# Altium PCB PCB_PROJECT_01.PcbDoc
Units mm, origin at the board's own origin, x right, y up, seen from the top; angles counter-clockwise.
Board outline 50 x 70 mm, 2 copper layers (Top Layer, Bottom Layer); 30 components, 29 nets, 133 pads, 18 vias.
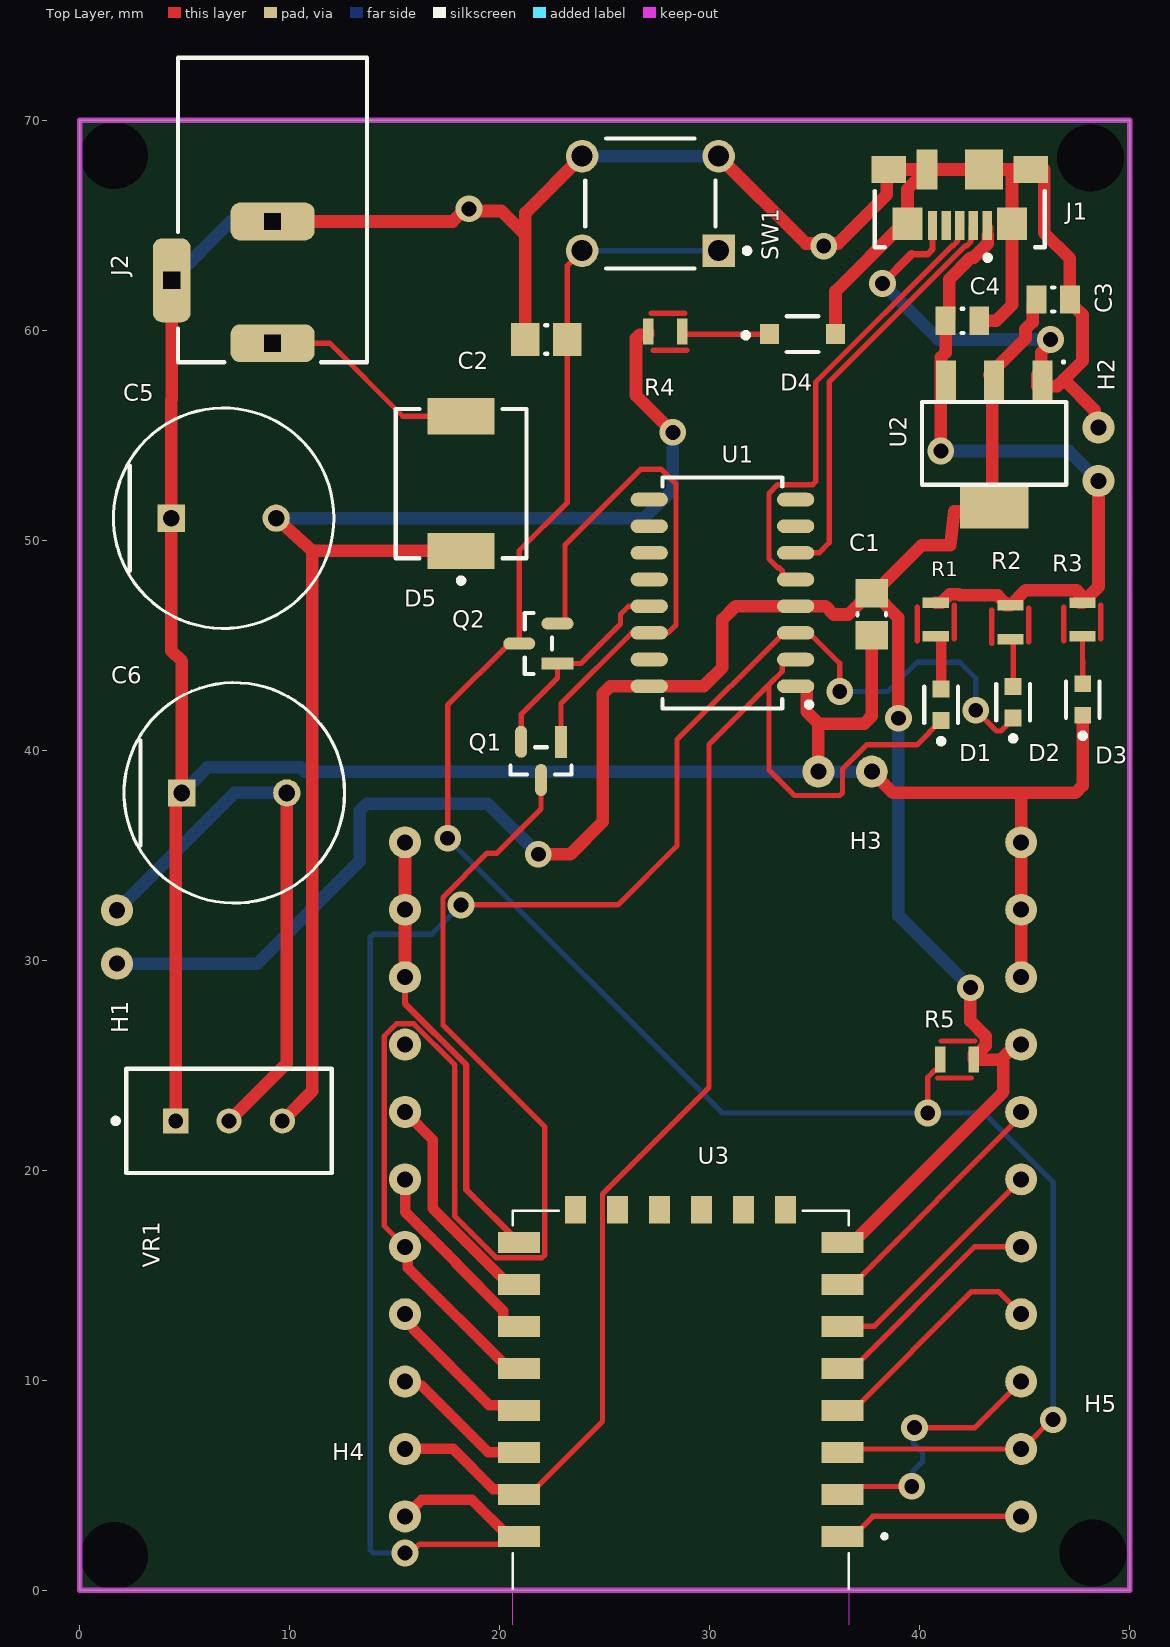
[diagram p0: Top Layer view]
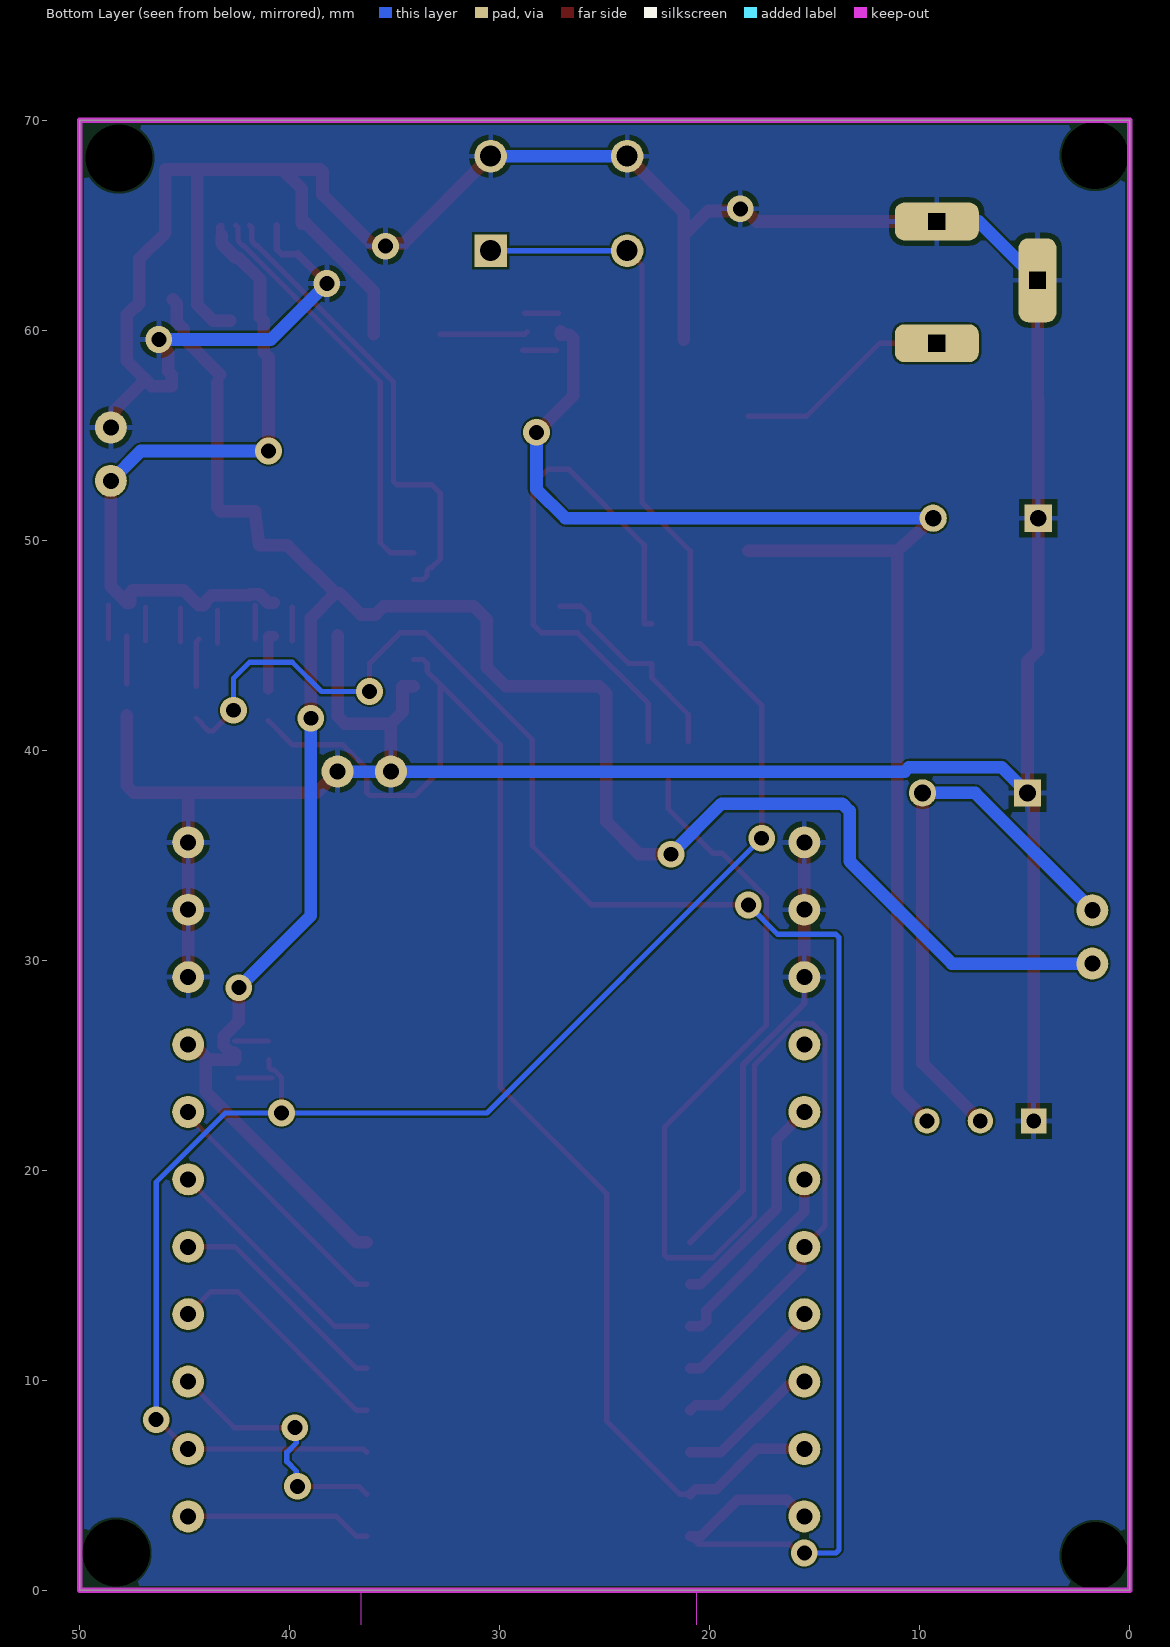
[diagram p1: Bottom Layer view, seen from below]

## Layer stack, top to bottom
Top Solder: solder mask 0.0102, Solder Resist, Dk 3.5
Top Layer: signal copper 0.0356
Dielectric 1: dielectric 0.32, FR-4, Dk 4.8
Bottom Layer: signal copper 0.0356
Bottom Solder: solder mask 0.0102, Solder Resist, Dk 3.5

## Board outline
0,0 0,70 50,70 50,0

## Design rules (kind name [scope] priority, off if disabled: settings)
Clearance [All] p1: gap=0.1 ignorepadtopadclearanceinfootprint=TRUE
HoleSize [All] p1: absolutevalues=TRUE maxlimit=3.2 minlimit=0.025 maxpercent=80.000 minpercent=20.000
MinimumSolderMaskSliver [All] p1: minsoldermaskwidth=0.15
PolygonConnect [All] p1: connectstyle=Relief reliefconductorwidth=0.254 reliefentries=4 polygonreliefangle="90 Angle" airgapwidth=0.254
RoutingVias [All] p1: holewidth=0.711 width=1.27 viastyle="Through Hole" minholewidth=0.711 minwidth=1.27 maxholewidth=0.711 maxwidth=1.27
SilkToSolderMaskClearance [All] p1: minsilkscreentomaskgap=0 clearancetoexposedcopper=TRUE
SolderMaskExpansion [All] p1: expansion=0 istentingtop=FALSE
SupplyNets "Schematic Supply Nets_3" [InNet('+12')] p1: voltage=0.000
SupplyNets "Schematic Supply Nets_2" [InNet('GND')] p2: voltage=0.000
SupplyNets "Schematic Supply Nets_1" [InNet('+5')] p3: voltage=0.000
SupplyNets "Schematic Supply Nets" [InNet('+3.3')] p4: voltage=0.000
Width [InNetClass('power')] p1: maxlimit=0.9 minlimit=0.3 preferedwidth=0.6 checkconnectedcopper=TRUE
Width Width_1 [All] p2: maxlimit=0.5 minlimit=0.2 preferedwidth=0.25
27 further rules are at their usual default settings.

## Classes and differential pairs
net class communication: D+ D- EN IO0 RST RX TX
net class power: 2-12V +3.3 +5 +12 GND

## Components (designator, comment, footprint, x,y, rotation, side; value= is the part's Value field where it differs from the comment)
C1 "100nF" CAPC0805(2012)145_M 37.719,46.482 r90 top
C2 "10uF" CAPC0805(2012)145_M 22.225,59.563 r180 top value=100nF
C3 "10uF" CAPC0805(2012)100_L 46.355,61.468 r0 top value=100nF
C4 "10uF" CAPC0805(2012)100_L 42.037,60.452 r180 top value=100nF
C5 "1000uF 16V" FP-RAD-TH-D_10_0_5-L_16_1-MFG 6.858,51.054 r0 top
C6 "1000uF 16V" FP-RAD-TH-D_10_0_5-L_16_1-MFG 7.366,37.973 r0 top
D1 "" FP-SML-LX0603SIW-TR-MFG 41.021,42.164 r90 top
D2 "SML-LX0603SIW-TR" FP-SML-LX0603SIW-TR-MFG 44.45,42.291 r90 top
D3 "SML-LX0603SIW-TR" FP-SML-LX0603SIW-TR-MFG 47.764,42.418 r90 top
D4 "5V5" FP-SOD123-MFG 34.417,59.817 r0 top
D5 "SS34-E3/9AT" FP-SMC-MFG 18.161,52.705 r90 top
H1 "HDR_2PIN" HDR_2PIN 1.778,29.845 r0 top
H2 "HDR_2PIN" HDR_2PIN 48.514,55.372 r180 top
H3 "HDR_2PIN" HDR_2PIN 37.719,38.989 r90 top
H4 "11Pin Header" HDR_11PIN 575.056,-42.984 r180 top
H5 "11Pin Header" HDR_11PIN 604.393,-42.984 r180 top
J1 "473460001" FP-473460001-MFG 41.91,67.31 r180 top
J2 "694106301002" 694106301002 9.187,65.734 r180 top
Q1 "BSS138" FP-318-08-IPC_B 21.971,39.497 r270 top
Q2 "BSS138" FP-318-08-IPC_B 21.844,45.085 r180 top
R1 "1K" RES0805#1 40.767,46.228 r270 top
R2 "1K" RES0805#1 44.323,46.101 r270 top
R3 "1K" RES0805#1 47.752,46.228 r270 top
R4 "10K" RES0805#1 27.884,59.944 r0 top
R5 "10K" RES0805#2 41.783,25.273 r180 top
SW1 "B3F-1055" FP-B3F-1055-MFG 27.178,66.04 r180 top
U1 "SOP16" CH340C 30.607,47.498 r180 top
U2 "3.3" AMS11173.3 43.547,54.556 r270 top
U3 "ESP-12F" XCVR_ESP-12F 28.622,6.072 r180 top
VR1 "3296W-1-103LF" FP-3296W-MFG 7.112,22.357 r270 top

## Footprints (in the part's own frame and the unit in brackets; to place one, negate y for a bottom-side part, rotate by r counter-clockwise, add the part's x,y. Pads: shape width x height; smd on the part's side, far side on the other; paste and mask are expansions set on the pad)
694106301002 [mm] "DC Power Jack Right Angled(6.4)"
  rrect50% 4x1.8 hole 0.8 square: 1(0,6.35) 2(0,0.55)
  rrect50% 1.8x4 hole 0.8 square: 3(4.8,3.35)
  silkscreen extent -4.5,-7.25 4.5,7.25, body extent -4.5,-7.25 5,7.25, height 10.75
AMS11173.3 [mm] "SOT223, 4-Leads, Body 6.51x7.00mm (avg), Pitch 2.30mm, IPC Medium Density"
  rect 2.05x0.95 smd: 1(-2.975,2.3) 2(-2.975,0) 3(-2.975,-2.3)
  rect 2.05x3.25 smd: 4(2.975,0)
  silkscreen extent -4,-3.43 1.91,3.43, body extent -1.65,-3.15 1.86,3.36, height 1.8
CAPC0805(2012)100_L [mm] "Chip Capacitor, Body 2.0x1.2mm, Height 1.0mm, IPC High Density"
  rect 0.95x1.35 smd: 1(-0.8,0) 2(0.8,0)
  silkscreen extent -0.05,-0.58 0.05,0.58, body extent -1.1,-0.72 1.1,0.72, height 1
CAPC0805(2012)145_M [mm] "Chip Capacitor, Body 2.0x1.2mm, Height 1.45mm, IPC Low Density"
  rect 1.35x1.55 smd: 1(-1,0) 2(1,0)
  silkscreen extent -0.05,-0.67 0.05,0.67, body extent -1.1,-0.72 1.1,0.72, height 1.45
CH340C [mm] "SOP, 16-Leads, Body 10.55x5.40mm, Pitch 1.27mm, IPC Medium Density"
  oval 1.775x0.65 smd: 1(-3.488,4.445) 2(-3.488,3.175) 3(-3.488,1.905) 4(-3.488,0.635) 5(-3.488,-0.635) 6(-3.488,-1.905) 7(-3.488,-3.175) 8(-3.488,-4.445) 9(3.488,-4.445) 10(3.488,-3.175) 11(3.488,-1.905) 12(3.488,-0.635) 13(3.488,0.635) 14(3.488,1.905) 15(3.488,3.175) 16(3.488,4.445)
  silkscreen extent -4.25,-5.5 2.85,5.5, body extent -2.7,-5.28 2.7,5.28, height 1.9
FP-318-08-IPC_B [mm]
  rect 1.524x0.578 smd paste+0 mask+0: 1(-0.91,0.95)
  rrect100% 1.524x0.578 smd paste+0 mask+0: 2(-0.91,-0.95) 3(0.91,0)
  silkscreen extent -0.65,-1.45 0.65,1.45, body extent -1.92,-1.7 1.92,1.7, height 0.25
FP-3296W-MFG [mm]
  rect 1.2x1.2 hole 0.7 paste-2539.97 mask+0: 1(0.005,-2.54)
  round 1.2 hole 0.7 paste-2539.97 mask+0: 2(0.005,0) 3(0.005,2.54)
  silkscreen extent -2.48,-5.52 2.48,4.89, body extent -2.58,-4.99 2.58,4.99, height 0.25
FP-473460001-MFG [mm]
  rect 0.45x1.38 smd paste+0 mask+0: 1(-1.3,2.31) 2(-0.65,2.31) 3(0,2.31) 4(0.65,2.31) 5(1.3,2.31)
  rect 1.425x1.55 smd paste+0 mask+0: 6(-2.488,2.225) 7(2.488,2.225)
  rect 1.65x1.3 smd paste+0 mask+0: 8(-3.375,-0.35) 11(3.375,-0.35)
  rect 1.8x1.9 smd paste+0 mask+0: 9(-1.15,-0.35)
  rect 1x1.9 smd paste+0 mask+0: 10(1.55,-0.35)
  silkscreen extent -4.05,0.67 4.05,3.97, body extent -4.3,-2.48 4.3,3.45, height 0.25
FP-B3F-1055-MFG [mm]
  rect 1.55x1.55 hole 1 paste-2539.97 mask+0: 1(-3.25,2.25)
  round 1.55 hole 1 paste-2539.97 mask+0: 2(3.25,2.25) 3(-3.25,-2.25) 4(3.25,-2.25)
  silkscreen extent -4.73,-3.1 3.1,3.1, body extent -4.13,-3.2 4.13,3.2, height 0.25
FP-RAD-TH-D_10_0_5-L_16_1-MFG [mm]
  rect 1.3x1.3 hole 0.8 paste-2539.97 mask+0: 1(-2.5,0)
  round 1.3 hole 0.8 paste-2539.97 mask+0: 2(2.5,0)
  silkscreen extent -5.25,-5.25 5.25,5.25, body extent -5.35,-5.35 5.35,5.35, height 0.25
FP-SMC-MFG [mm]
  rect 1.72x3.2 smd paste+0 mask+0: 1(-3.205,0) 2(3.205,0)
  silkscreen extent -4.75,-3.11 3.55,3.11, body extent -4.17,-3.21 4.17,3.21, height 0.25
FP-SML-LX0603SIW-TR-MFG [mm]
  rect 0.8x0.8 smd paste+0 mask+0: 1(-0.75,0) 2(0.75,0)
  silkscreen extent -1.85,-0.8 0.86,0.8, body extent -1.25,-0.56 1.25,0.56, height 0.25
FP-SOD123-MFG [mm]
  rect 0.9x0.95 smd paste+0 mask+0: 1(-1.575,0) 2(1.575,0)
  silkscreen extent -2.82,-0.85 0.75,0.85, body extent -2.12,-0.95 2.12,0.95, height 0.25
HDR_2PIN [mil]
  round 60 hole 30: 1(0,0) 2(0,100)
HDR_11PIN [mil]
  round 60 hole 30: 1(22029.98,-1830.9) 2(22029.98,-1957.27) 3(22029.98,-2083.64) 4(22029.98,-2210) 5(22029.98,-2336.37) 6(22029.98,-2462.74) 7(22029.98,-2589.11) 8(22029.98,-2715.48) 9(22029.98,-2841.85) 10(22029.98,-2968.22) 11(22029.98,-3094.59)
RES0805#1 [mm]
  rect 0.5x1.25 smd: 1(-0.8,0) 2(0.8,0)
  Top Layer lines w0.254: 1.003,-0.889 -0.597,-0.889 ; 0.925,0.875 0.525,0.875 -0.275,0.875 -0.675,0.875
RES0805#2 [mm]
  rect 0.5x1.25 smd: 1(-0.8,0) 2(0.8,0)
  Top Layer lines w0.254: 0.925,0.875 0.525,0.875 -0.275,0.875 -0.675,0.875 ; 0.762,-0.889 -0.838,-0.889
XCVR_ESP-12F [mm]
  rect 2x1 smd paste+0 mask+0.102: 1(-7.7,3.5) 2(-7.7,1.5) 3(-7.7,-0.5) 4(-7.7,-2.5) 5(-7.7,-4.5) 6(-7.7,-6.5) 7(-7.7,-8.5) 8(-7.7,-10.5) 15(7.7,-10.5) 16(7.7,-8.5) 17(7.7,-6.5) 18(7.7,-4.5) 19(7.7,-2.5) 20(7.7,-0.5) 21(7.7,1.5) 22(7.7,3.5)
  rect 1x1.3 smd paste+0 mask+0.102: 9(-5,-12.05) 10(-3,-12.05) 11(-1,-12.05) 12(1,-12.05) 13(3,-12.05) 14(5,-12.05)
  Keep-Out Layer region: 8,6 -8,6 -8,12 8,12
  silkscreen extent -9.8,-12 8,6, body extent -8.85,-12.9 8.85,12, height 3.1

## Part data
C1 C2: library part CMP-1036-04429-1, "CAP 100nF 100V ±10% 0805 (2012 Metric) Thickness 1.45mm SMD", Case-EIA=0805, Case-Metric=2012, Rated Voltage="100 V", Tolerance=Â±10%, Max Thickness="1.45 mm", Technology=SMT
C3 C4: library part CMP-1036-04418-1, Case-EIA=0805, Case-Metric=2012, Rated Voltage="50 V", Tolerance=Â±5%, Max Thickness="1 mm", Technology=SMT
C5 C6: library part CMP-05427-001094-1, "Aluminum Electrolytic Capacitors (Radial Lead Type) AEC-Q200 Qualified 1000uF ±20% 16V", Capacitance=1mF, Case/Package=Radial, Dielectric Material=Aluminium, Max Operating Temperature=105°C, Min Operating Temperature=-55°C, Ripple Current=1.24A, Tolerance=20%, Voltage=16V, Construction=RADIAL, Diameter=10mm, Height=16mm, Impedance=49mR, Lead Diameter=0.6mm, Lead Pitch=5mm, Life (Hours)=4000Hour, Mount="Through Hole", Number of Pins=2, Packaging=Bulk, Radiation Hardening=No, REACH SVHC="No SVHC", RoHS Compliant=Yes, Series="FK Radial", Termination=Radial, Voltage Rating=16V, Voltage Rating (DC)=16V
D1: library part CMP-57192-000009-1, "LED RED DIFFUSED SMD", Case Code (Imperial)=0603, Case Code (Metric)=1608, Color=Red, Forward Current=20mA, Forward Voltage=2V, Lens Color=White, Max Operating Temperature=85°C, Min Operating Temperature=-25°C, Package Quantity=1, Power Rating=50mW, Approvals=UL, Case/Package=0603, Dominant Wavelength=636nm, Height=0.6mm, Illumination Color=Red, Lead Free="Lead Free", Length=1.6mm, Lens Style=Diffused, Lens Transparency=Diffused, Luminous Intensity=60mcd, Moisture Sensitivity Level=2, Mount="Surface Mount", Number of LEDs=1, Number of Pins=2, Packaging="Tape and Reel", REACH SVHC="No SVHC", RoHS Compliant=Yes, Test Current=20mA, Viewing Angle=140°, Wavelength=636nm, Width=0.8mm
D2: library part CMP-57192-000009-1, "LED RED DIFFUSED SMD", Case Code (Imperial)=0603, Case Code (Metric)=1608, Color=GREEN, Forward Current=20mA, Forward Voltage=2V, Illumination Color=Red, Lens Color=White, Max Operating Temperature=85°C, Min Operating Temperature=-25°C, Package Quantity=1, Power Rating=50mW, Approvals=UL, Case/Package=0603, Dominant Wavelength=636nm, Height=0.6mm, Lead Free="Lead Free", Length=1.6mm, Lens Style=Diffused, Lens Transparency=Diffused, Luminous Intensity=60mcd, Moisture Sensitivity Level=2, Mount="Surface Mount", Number of LEDs=1, Number of Pins=2, Packaging="Tape and Reel", REACH SVHC="No SVHC", RoHS Compliant=Yes, Test Current=20mA, Viewing Angle=140°, Wavelength=636nm, Width=0.8mm
D3: library part CMP-57192-000009-1, "LED RED DIFFUSED SMD", Case Code (Imperial)=0603, Case Code (Metric)=1608, Color=YELLOW, Forward Current=20mA, Forward Voltage=2V, Illumination Color=Red, Lens Color=White, Max Operating Temperature=85°C, Min Operating Temperature=-25°C, Package Quantity=1, Power Rating=50mW, Approvals=UL, Case/Package=0603, Dominant Wavelength=636nm, Height=0.6mm, Lead Free="Lead Free", Length=1.6mm, Lens Style=Diffused, Lens Transparency=Diffused, Luminous Intensity=60mcd, Moisture Sensitivity Level=2, Mount="Surface Mount", Number of LEDs=1, Number of Pins=2, Packaging="Tape and Reel", REACH SVHC="No SVHC", RoHS Compliant=Yes, Test Current=20mA, Viewing Angle=140°, Wavelength=636nm, Width=0.8mm
D4: library part CMP-2000-05976-2, "DIODE ZENER 5.1V 500MW SOD123", Forward Current=10mA, Manufacturer="Diodes Incorporated", Manufacturer Part Number=BZT52C5V1-7-F, Max Junction Temp=+150°C, Max Reverse Leakage Current=2uA, Max Zener Voltage=5.4V, Nom Zener Voltage=5.1V, Package=SOD123, Power Dissipation=370mW, Temperature="-65°C to +150°C", Temperature Range Low=-65°C, Automotive=No, Automotive Grade=NA, Category=Diode, ComponentLink2Description=Datasheet, ComponentLink2URL=https://www.diodes.com/assets/Datasheets/ds18004.pdf, Device Class L1="Discrete Semiconductors", Device Class L2=Diodes, Device Class L3="Zener Diodes", Digikey Description="DIODE ZENER 5.1V 500MW SOD123", Footprint Url=https://www.diodes.com/assets/Package-Files/SOD123.pdf, Height=1.45mm, Lead Free=Yes, Mouser Description="Zener Diodes 5.1V 500mW", Octopart=https://octopart.com/bzt52c5v1-7-f-diodes+inc.-326718, RoHS=TRUE, Standoff Height=0mm, Temperature Range High=+150°C, Zener Impedance=60Ω
D5: library part CMP-02539-000066-1, "DIODE SCHOTTKY 40V 3A DO214AB", Average Rectified Current=3A, Case/Package=SMC, Forward Voltage=500mV, Max Operating Temperature=125°C, Max Repetitive Reverse Voltage (Vrrm)=40V, Max Reverse Current=500uA, Max Surge Current=100A, Min Operating Temperature=-55°C, Package Quantity=3500, Element Configuration=Single, Forward Current=3A, Max Reverse Leakage Current=500uA, Max Reverse Voltage (DC)=40V, Mount="Surface Mount", Number of Pins=2, Packaging="Tape and Reel", Peak Non-Repetitive Surge Current=100A, Radiation Hardening=No, RoHS Compliant=Yes, Series=-
H1 H2 H3: "2-Pin Header"
J1: library part CMP-2000-05246-2, "CONN RCPT USB2.0 MICRO B SMD R/A", Current Rating=1.8A, Manufacturer=Molex, Package=0, Temperature="-30°C to +85°C", Temperature Range High=+85°C, Temperature Range Low=-30°C, Voltage Rating=30V, Automotive=No, Category=Conn, ComponentLink2Description=Datasheet, ComponentLink2URL=https://www.molex.com/webdocs/datasheets/pdf/en-us/0473460001_IO_CONNECTORS.pdf, Conn Orientation="Right Angle", Contact Material=Gold,Nickel, Device Class L1=Connectors, Device Class L2="USB Connectors", Device Class L3=unset, Digikey Description="CONN RCPT USB2.0 MICRO B SMD R/A", Footprint Url=https://www.molex.com/pdm_docs/sd/473460001_sd.pdf, Height=2.945mm, Is Female=yes, Lead Free=Yes, Manufacturer Part Number=473460001, Number Of Contacts=5, Octopart=https://octopart.com/47346-0001-molex-7164928, Pitch=0.65mm, RoHS=TRUE, Shielding=true, Usb Standard="USB 2.0"
J2: library part CMP-1502-00188-3, "DC Power Jack Connector WR-DC, Male, Right Angled, THT, 5 A, 24 V", Color=Black, Current Rating=5A, Flammability Rating="UL94 V-0", Insulation Resistance=100MΩ, Max Operating Temperature=85°C, Min Operating Temperature=-40°C, Operating Supply Voltage=24V, Connector Type=Power, Contact Gender=Female, Contact Material="Gold, Tin", Contact Plating=Tin, Gender=Male, Height=11mm, Housing Material=Polyamide, Mount="Through Hole", Number Of Contacts=3, Packaging=Bulk, REACH SVHC=Unknown, RoHS=Compliant, Shielding=Unshielded, Termination="Through Hole", Voltage Rating=24V
Q1 Q2: library part CMP-07173-000101-1, "MOSFET N-CH 50V 220MA SOT-23", Case/Package=SOT-23, Continuous Drain Current (ID)=220mA, Drain to Source Breakdown Voltage=50V, Drain to Source Resistance=3.5R, Gate to Source Voltage (Vgs)=20V, Input Capacitance=27pF, Max Operating Temperature=150°C, Max Power Dissipation=360mW, Min Operating Temperature=-55°C, On-State Resistance=6R, Package Quantity=1, Threshold Voltage=1.3V, Contact Plating=Tin, Current Rating=220mA, Drain to Source Voltage (Vdss)=50V, Dual Supply Voltage=50V, Element Configuration=Single, Fall Time=9ns, Height=0.93mm, Lead Free="Lead Free", Length=2.92mm, Mount="Surface Mount", Nominal Vgs=1.3V, Number of Elements=1, Number of Pins=3, Packaging="Tape and Reel", Power Dissipation=360mW, Radiation Hardening=No, Rds On Max=3.5R, REACH SVHC="No SVHC", Rise Time=9ns, Termination=SMD/SMT, Turn-Off Delay Time=20ns, Turn-On Delay Time=2.5ns, Voltage Rating (DC)=50V, Weight=0.03g, Width=1.3mm
R1 R2 R3 R4 R5: library part RES0805
SW1: library part CMP-08834-000061-1, "SWITCH TACTILE SPST-NO 0.05A 24V", Actuator Color=Orange, Contact Current Rating=50mA, Contact Resistance=100mR, Max Operating Temperature=70°C, Max Voltage Rating (DC)=24V, Min Operating Temperature=-25°C, Operating Force=2.55N, Package Quantity=1500, Actuator Length=3mm, Contact Material=Gold, Contact Plating=Silver, Contact Type="1 maker", Current Rating=50mA, Depth=6mm, Electrical Life=300000Cycles, Height=7.3mm, Illumination Type=Non-Illuminated, Lead Free="Lead Free", Length=6mm, Max Current Rating=50mA, Mechanical Life=100000Cycles, Mount="Through Hole", Number of Poles=1, Orientation=Straight, Packaging=Bag, RoHS Compliant=Yes, Series=B3F, Switch Function=Off-Mom, Switch Travel=0.25mm, Termination="PC Pins", Throw Configuration=SPST, Voltage Rating (DC)=24V, Weight=0.25g, Width=6mm
U1: library part CH3400C
U2: library part AMS11173.3, "3LEAD SOT-223 PLASTIC PACKAGE"
U3: "WiFi Module", Package=Package, Check_prices=https://www.snapeda.com/parts/ESP-12F/AI-Thinker/view-part/?ref=eda, MF=AI-Thinker, MP=ESP-12F, SnapEDA_Link=https://www.snapeda.com/parts/ESP-12F/AI-Thinker/view-part/?ref=snap
VR1: library part CMP-1747-00001-8, "TRIMMER 10K OHM 0.5W PC PIN TOP", Color=Blue, Insulation Resistance=1GR, Max Operating Temperature=125°C, Max Power Dissipation=500mW, Min Operating Temperature=-55°C, Package Quantity=50, Resistance=10kR, Resistance Tolerance=10%, Resistor Type=Cermet, Temperature Coefficient=100ppm/°C, Contact Plating=Tin, Depth=4.83mm, Height=11.55mm, Lead Free="Lead Free", Length=9.53mm, Military Standard=Not, Mount="Through Hole", Number of Turns=25, Packaging=Rail/Tube, Power Rating=500mW, Radiation Hardening=No, Reach SVHC Compliant=Yes, RoHS Compliant=Yes, Series=3296, Taper=Linear, Technology=CERMET, Termination=Pin, Tolerance=10%, Weight=0.03oz, Width=9.53mm

## Free pads (board coordinates)
  round 1.524 hole 3.2 unplated: 38(1.651,68.326) 39(48.133,68.199) 40(48.26,1.778) 41(1.651,1.651)

## Via types
v1: diameter 1.27, hole 0.711, Top Layer to Bottom Layer, 17 vias
v2: diameter 1.27/1.27 (per signal layer), hole 0.711, Top Layer to Bottom Layer, 1 vias

## Nets (pads, with @x,y where several pads share a name; then routed paths per layer and width w, separated by ;. In a path a pad name is that pad's centre, name@x,y a point inside that pad or via, vN(x,y) a via of type N, cw(c..) or ccw(c..) an arc to the next point about the centre after c; other vN are vias at no path point)
2-12V: C6.2 H1.2 VR1.2 | length 27.2
  Top Layer w0.6: VR1.2 9.866,25.106 C6.2
  Bottom Layer w0.6: H1.2 7.366,37.973 C6.2
+3.3: C1.2 C3.1 H1.1 H5.8 R5.1 U1.4 U1.16 U2.2 U2.4 U3.8 | length 109.7
  Top Layer w0.6: v1(21.844,35.052) 23.368,35.052 24.917,36.601 24.917,42.702 25.269,43.053 U1.16 29.718,43.053 30.607,43.942 30.607,46.228 31.242,46.863 U1.4 35.509,46.863 35.906,46.466 36.603,46.466 37.619,47.482 C1.2@37.819,47.482 ; U3.8 36.822,16.572 43.989,23.739 43.989,25.148 ; v1(38.989,41.529) 38.989,46.312 C1.2@37.819,47.482 ; v1(42.418,28.702) 42.418,27.11 43.148,26.38 43.148,25.944 42.802,25.598 42.633,25.598 42.583,25.548 R5.1 43.864,25.273 44.581,25.99 H5.8 ; U2.4@43.307,51.381 41.653,51.381 41.453,49.759 40.096,49.759 C1.2@37.819,47.482 ; U2.2@43.307,57.881 45.039,59.613 45.039,60.055 45.38,60.396 45.38,61.293 C3.1 ; U2.4@43.448,51.581 U2.2@43.448,57.531
  Bottom Layer w0.6: H1.1 8.462,29.845 13.335,34.718 13.335,37.114 13.686,37.465 19.431,37.465 v1(21.844,35.052) ; v1(38.989,41.529) 38.989,32.131 v1(42.418,28.702)
+5: C4.2 H2.2 J1.1 R1.1 R2.1 R3.1 U2.3 | length 34.1
  Top Layer w0.2: J1.1 J1.1@43.307,64.903
  Top Layer w0.4: J1.1@43.235,64.516 43.307,64.588 J1.1@43.307,64.903
  Top Layer w0.6: R1.1 41.042,47.028 41.115,47.101 41.115,47.121 41.424,47.43 41.86,47.43 41.912,47.378 43.712,47.378 44.05,47.04 44.05,46.951 44.1,46.901 R2.1@44.171,46.901 ; v1(41.007,54.254) 41.007,58.715 41.237,58.945 C4.2 41.412,60.627 41.412,62.44 42.428,63.456 42.567,63.456 43.235,64.124 J1.1@43.235,64.516 ; R2.1 45.047,47.625 47.473,47.625 47.6,47.498 47.6,47.028 R3.1 48.514,47.79 H2.2
  Bottom Layer w0.6: v1(41.007,54.254) 47.092,54.254 H2.2
+12: C5.2 D5.1 R4.1 VR1.3 | length 65.3
  Top Layer w0.6: C5.2 11.074,49.5 ; VR1.3 11.074,23.774 11.074,49.5 ; D5.1 11.074,49.5 ; R4.1 27.084,59.792 26.67,59.792 26.492,59.614 26.492,56.896 v1(28.245,55.143)
  Bottom Layer w0.6: C5.2 26.873,51.054 28.245,52.426 v1(28.245,55.143)
ADC: H5.3 U3.2 | length 12.7
  Top Layer w0.254: U3.2 36.695,4.945 39.616,4.945 v1(39.624,4.953) ; v1(39.751,7.747) 42.637,7.747 H5.3
  Bottom Layer w0.254: v1(39.624,4.953) 39.688,5.016 39.688,5.683 40.132,6.128 40.132,6.572 39.688,7.017 39.688,7.683 v1(39.751,7.747)
D+: J1.3 U1.5 | length 22.5
  Top Layer w0.254: U1.5 33.64,48.133 33.457,48.316 33.457,48.548 33.308,48.697 33.24,48.697 32.826,49.111 32.826,52.235 33.24,52.649 34.903,52.649 35.052,52.798 35.052,57.531 41.554,64.033 41.6,64.033 41.762,64.195 41.762,64.241 41.812,64.291 41.812,64.902 J1.3
D-: J1.2 U1.6 | length 19.8
  Top Layer w0.254: U1.6 35.204,49.403 35.687,49.886 35.687,57.531 42.189,64.033 42.25,64.033 42.412,64.195 42.412,64.256 42.462,64.306 42.462,64.902 J1.2
EN: C2.1 H5.2 Q2.3 R5.2 SW1.1 SW1.2 U3.3 | length 97.9
  Top Layer w0.254: v1(17.526,35.814) 17.526,42.15 20.461,45.085 Q2.3 20.93,45.085 20.93,49.505 23.225,51.8 C2.1 23.225,63.087 SW1.2 ; U3.3 36.481,6.731 H5.2 44.895,6.731 46.291,8.128 v1(46.355,8.128) ; v1(40.386,22.733) 40.386,24.427 40.734,24.775 40.86,24.775 40.983,24.898 R5.2
  Bottom Layer w0.254: v1(17.526,35.814) 30.607,22.733 v1(40.386,22.733) 43.067,22.733 46.355,19.445 v1(46.355,8.128) ; SW1.2 SW1.1
GND: C1.1 C2.2 C3.2 C4.1 C5.1 C6.1 D3.1 D4.2 H2.1 H3.1 H3.2 H4.9 H4.10 H4.11 H5.9 H5.10 H5.11 J1.5 J1.6 J1.7 J1.8 J1.9 J1.10 J1.11 J2.2 J2.3 SW1.3 SW1.4 U1.1 U2.1 U3.15 VR1.1 | length 233.1
  Top Layer w0.3: H4.9 15.494,27.94 18.415,25.019 18.415,19.079 U3.15 ; 39.624,63.627 40.377,63.627 40.61,63.86 J1.5
  Top Layer w0.4: v1(38.227,62.23) 39.624,63.627
  Top Layer w0.6: J2.3 4.387,56.721 4.358,56.693 C5.1 4.358,44.755 4.866,44.247 C6.1 4.572,37.679 VR1.1 ; J2.2 17.759,65.184 18.361,65.786 v2(18.542,65.786) 18.647,65.681 20.077,65.681 21.225,64.533 ; H4.9 H4.10 H4.11 ; C2.2 21.225,64.533 ; SW1.4 21.225,65.587 21.225,64.533 ; SW1.3 34.582,64.136 35.305,64.136 v1(35.433,64.008) 35.561,64.136 36.111,64.136 38.436,66.461 38.436,67.561 J1.11 J1.10 ; U1.1 34.603,43.053 34.626,43.03 34.626,41.828 35.179,41.275 ; H3.2 35.179,41.275 ; D4.2 35.992,61.859 39.218,65.085 J1.7 39.422,66.722 J1.10 ; H3.1 38.735,37.973 44.704,37.973 ; C1.1 37.719,41.626 37.368,41.275 35.179,41.275 ; C4.1 43.636,60.452 44.398,61.214 J1.6 44.398,67.66 ; H5.9 H5.10 H5.11 44.831,37.846 44.704,37.973 ; v1(46.228,59.563) 46.228,59.382 45.782,58.936 45.782,58.056 45.607,57.881 45.607,57.331 46.555,57.331 ; 46.631,57.426 46.863,57.658 ; D3.1 47.764,38.324 47.413,37.973 44.704,37.973 ; H2.1 48.337,55.549 48.337,56.184 46.863,57.658 ; J1.10 J1.9 44.398,67.66 ; 44.398,67.66 J1.8 45.923,67.66 45.923,64.643 47.155,63.411 C3.2 47.155,61.268 47.33,61.093 47.401,61.093 47.752,60.742 47.752,58.547 46.863,57.658
  Bottom Layer w0.6: J2.3 7.187,65.184 J2.2 ; C6.1 6.085,39.192 10.516,39.192 10.719,38.989 H3.2 H3.1 ; SW1.4 SW1.3 ; v1(38.227,62.23) 40.894,59.563 v1(46.228,59.563)
IO0: H4.5 Q1.3 U3.18 | length 62.4
  Top Layer w0.254: H4.5 14.505,17.349 14.505,26.399 15.084,26.979 15.904,26.979 17.866,25.017 17.866,17.807 19.828,15.845 22.016,15.845 22.149,15.978 22.149,22.062 17.299,26.912 17.299,32.996 19.406,35.104 19.864,35.104 21.971,37.211 Q1.3
  Top Layer w0.5: H4.5 15.633,16.221 15.633,15.361 20.422,10.572 U3.18
IO2: H4.6 U3.17 | length 9.5
  Top Layer w0.5: H4.6 15.494,18.034 17.931,15.597 17.931,15.563 20.172,13.322 20.172,12.822 20.422,12.572 U3.17
IO4: H4.4 U3.19 | length 7.5
  Top Layer w0.5: H4.4 15.494,12.873 15.901,12.466 15.901,12.42 19.499,8.822 20.672,8.822 U3.19
IO5: H4.3 U3.20 | length 6.8
  Top Layer w0.5: H4.3 15.69,9.745 16.29,9.745 19.463,6.572 U3.20
IO12: H5.6 U3.6 | length 11.4
  Top Layer w0.254: U3.6 37.833,12.572 H5.6
IO13: H5.7 U3.7 | length 12
  Top Layer w0.254: U3.7 36.822,14.572 44.831,22.581 H5.7
IO14: H5.5 U3.5 | length 10.9
  Top Layer w0.254: U3.5 36.822,10.572 42.61,16.36 H5.5
IO15: H4.7 U3.16 | length 10.7
  Top Layer w0.5: H4.7 16.81,21.463 16.81,18.184 20.422,14.572 U3.16
IO16: H5.4 U3.4 | length 11.3
  Top Layer w0.254: U3.4 36.822,8.572 42.474,14.224 43.758,14.224 H5.4
NetC3_1: 
NetD1_2: D1.2 R1.2 | length 2.8
  Top Layer w0.5: R1.2 41.021,45.428 D1.2
NetD2_2: D2.2 R2.2 | length 2.3
  Top Layer w0.254: R2.2 44.327,45.301 44.45,45.178 D2.2
NetD3_2: D3.2 R3.2 | length 2.3
  Top Layer w0.254: R3.2 47.752,44.285 47.764,44.272 D3.2
NetD4_1: D4.1 R4.2 | length 4.2
  Top Layer w0.254: R4.2 28.684,59.94 28.807,59.817 D4.1
NetD5_2: D5.2 J2.1 | length 10.4
  Top Layer w0.254: J2.1 11.913,59.384 15.387,55.91 D5.2
NetQ1_1: Q1.1 Q2.2 U1.14 | length 26.7
  Top Layer w0.254: Q2.2 23.114,46.035 23.114,49.784 26.721,53.391 27.686,53.391 28.397,52.68 28.397,45.974 28.016,45.593 U1.14 26.289,45.593 22.921,42.225 Q1.1
NetQ1_2: Q1.2 Q2.1 U1.13 | length 10.2
  Top Layer w0.254: Q1.2 21.021,41.711 22.754,43.444 Q2.1 23.875,44.135 25.756,46.016 25.756,46.482 26.137,46.863 U1.13
RST: H5.1 U3.1 | length 8.9
  Top Layer w0.254: U3.1 36.822,2.572 37.771,3.521 H5.1
RX: D2.1 H4.1 U1.3 U3.22 | length 87.7
  Top Layer w0.254: v1(15.494,1.778) 15.769,1.778 16.19,2.199 20.549,2.199 U3.22 ; v1(18.161,32.639) 25.632,32.639 28.448,35.455 28.448,40.509 33.532,45.593 34.741,45.593 36.195,44.139 v1(36.195,42.799) ; v1(42.672,41.91) 43.661,40.921 43.871,40.921 44.177,41.227 44.177,41.268 D2.1
  Top Layer w0.5: H4.1 15.502,3.521 16.299,4.318 18.676,4.318 20.422,2.572 U3.22
  Bottom Layer w0.254: v1(15.494,1.778) 13.992,1.778 13.843,1.927 13.843,31.093 13.992,31.242 16.764,31.242 v1(18.161,32.639) ; v1(36.195,42.799) 38.481,42.799 39.878,44.196 41.91,44.196 42.672,43.434 v1(42.672,41.91)
TX: D1.1 H4.2 U1.2 U3.21 | length 67
  Top Layer w0.254: U3.21 21.422,4.572 24.895,8.045 24.895,18.866 29.972,23.943 29.972,40.274 32.826,43.128 ; U1.2 33.639,44.323 33.456,44.14 33.456,43.758 32.826,43.128 ; D1.1 39.866,40.259 37.465,40.259 36.322,39.116 36.322,37.973 36.195,37.846 34.036,37.846 32.826,39.056 32.826,43.128
  Top Layer w0.5: H4.2 17.78,6.731 19.689,4.822 20.672,4.822 U3.21
pads on no net: H4.8 J1.4 U1.7 U1.8 U1.9 U1.10 U1.11 U1.12 U1.15 U3.9 U3.10 U3.11 U3.12 U3.13 U3.14

## Polygon pours and split planes (outlines as drawn)
GND on Bottom Layer "GND_L02_P001" (solid, pour order 1): 0,70 50,70 50,0 0,0

## Keep-outs
Keep-Out Layer:
  the board outline again, w0.25

## Text inside footprints (layer, text, board x,y; h text height)
U3: Mechanical 13 "ANTENNA" at 28.622,-3.128 h0.8 r180